# Altium PCB FOC Drive.PcbDoc
Units mil, origin at the board's own origin, x right, y up, seen from the top; angles counter-clockwise.
Board outline 2700 x 1600 mil, 2 copper layers (Top Layer, Bottom Layer); 48 components, 44 nets, 259 pads, 33 vias.
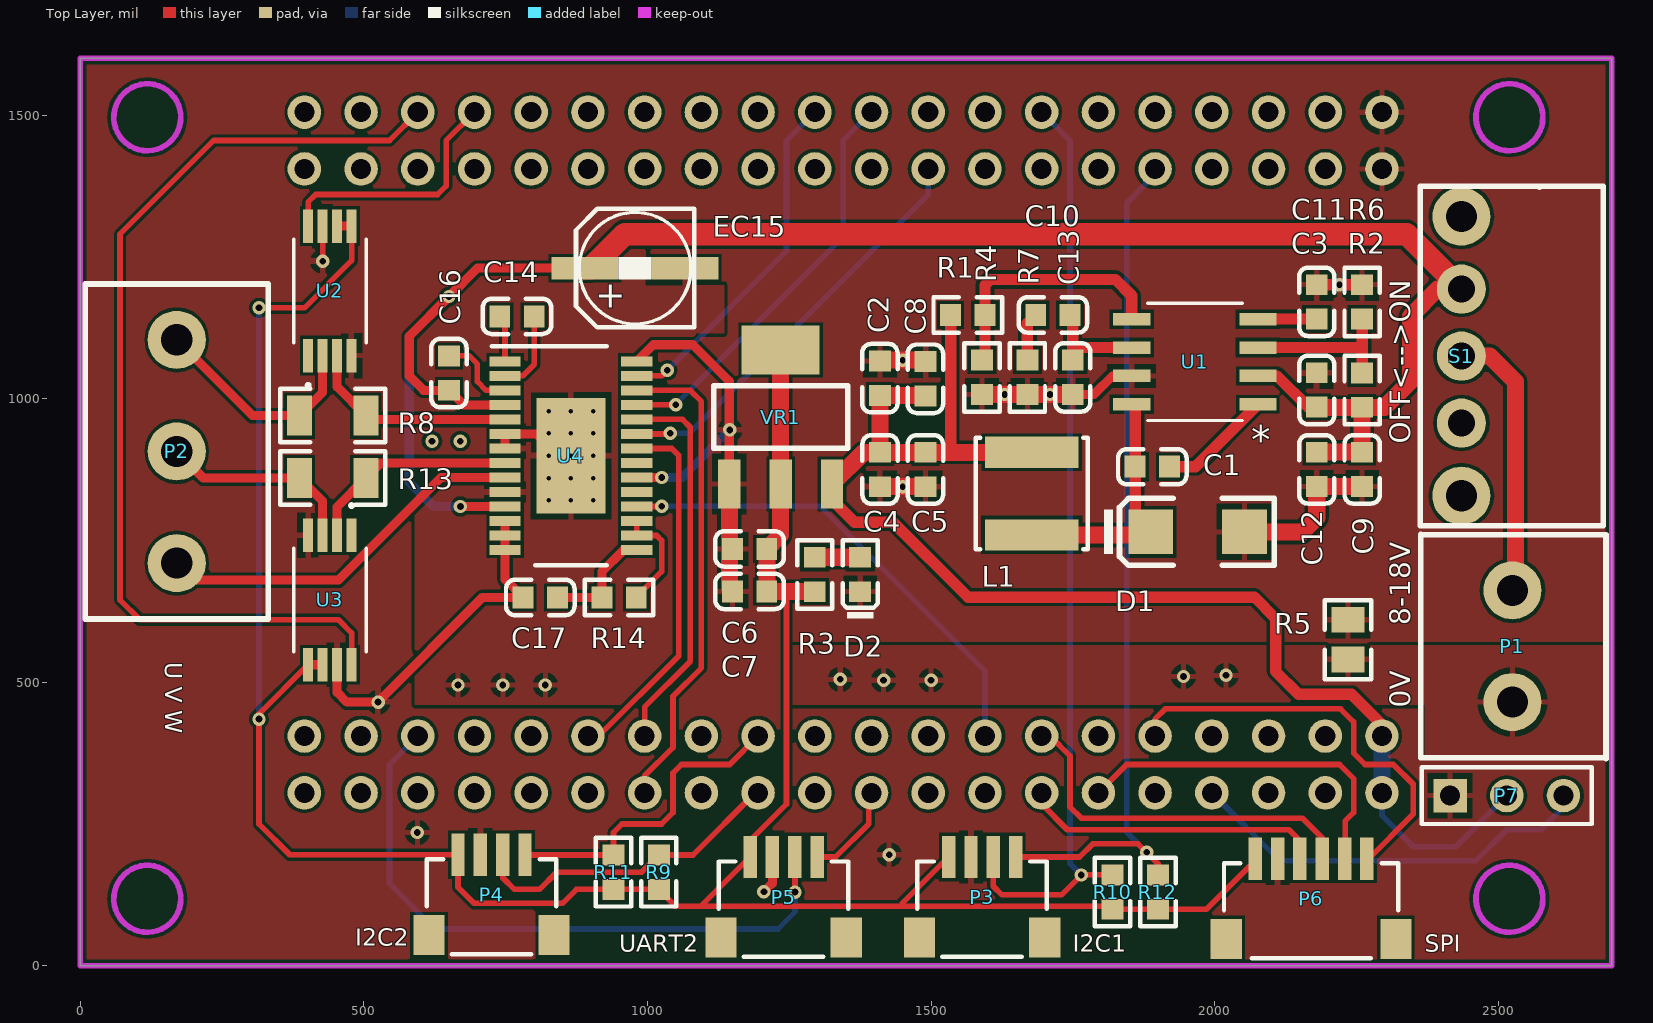
[diagram p0: Top Layer view]
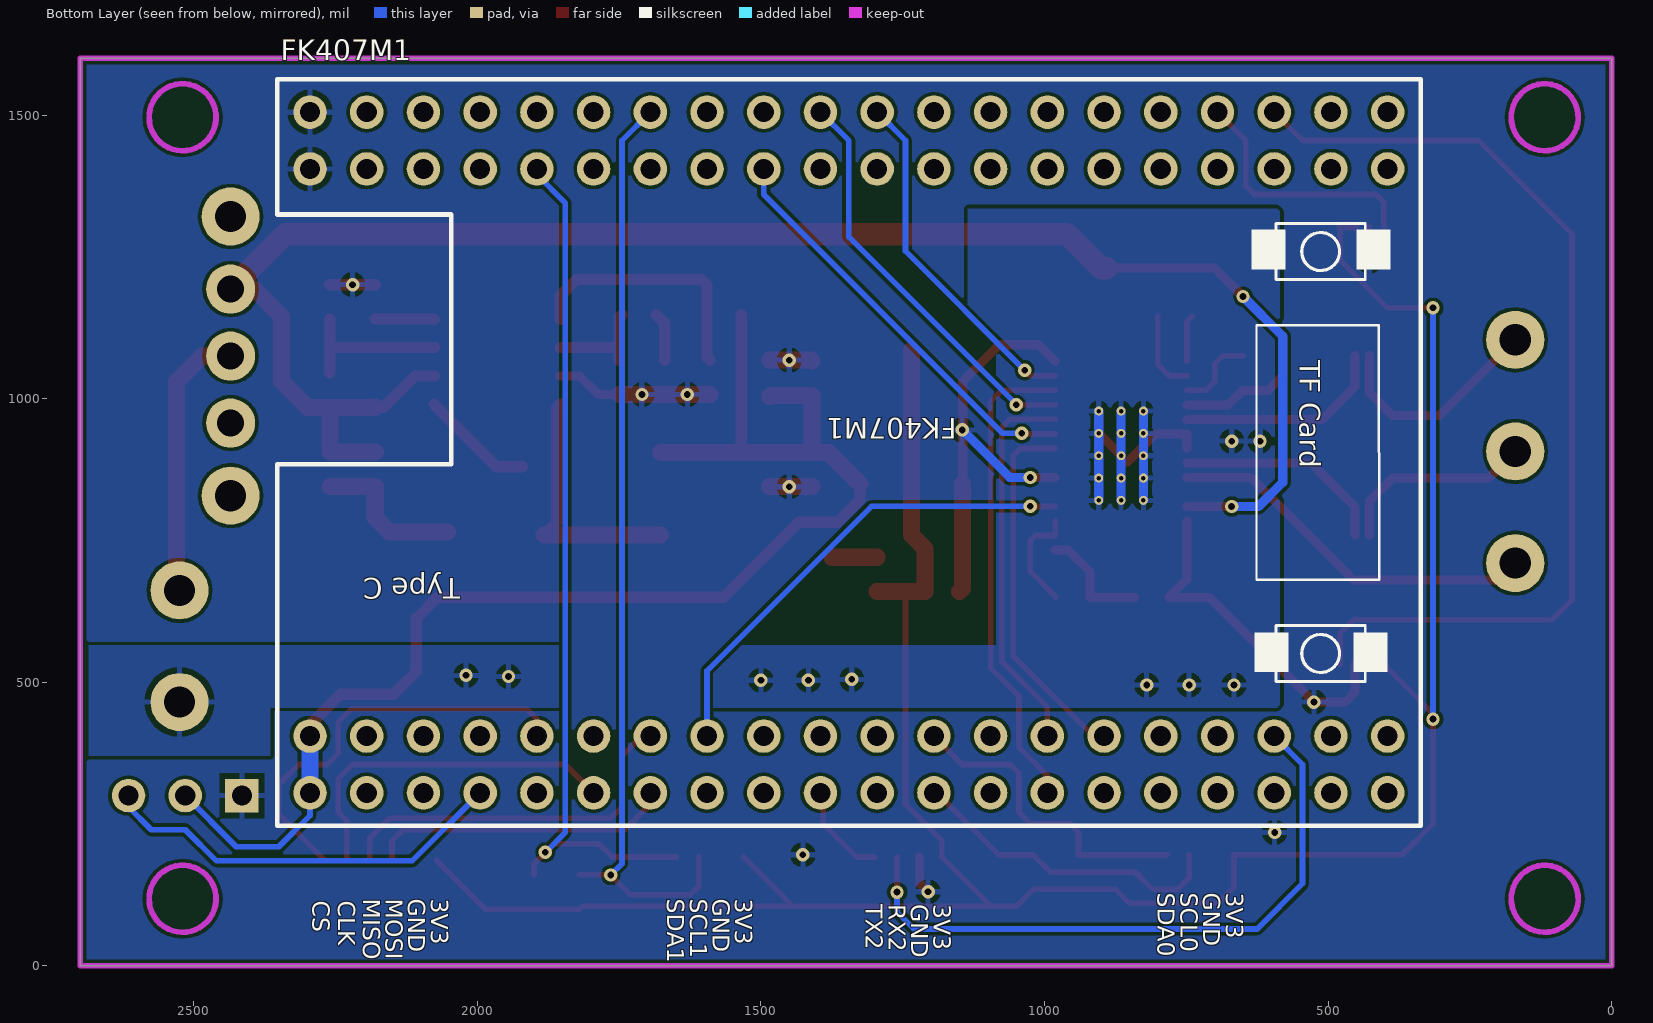
[diagram p1: Bottom Layer view, seen from below]
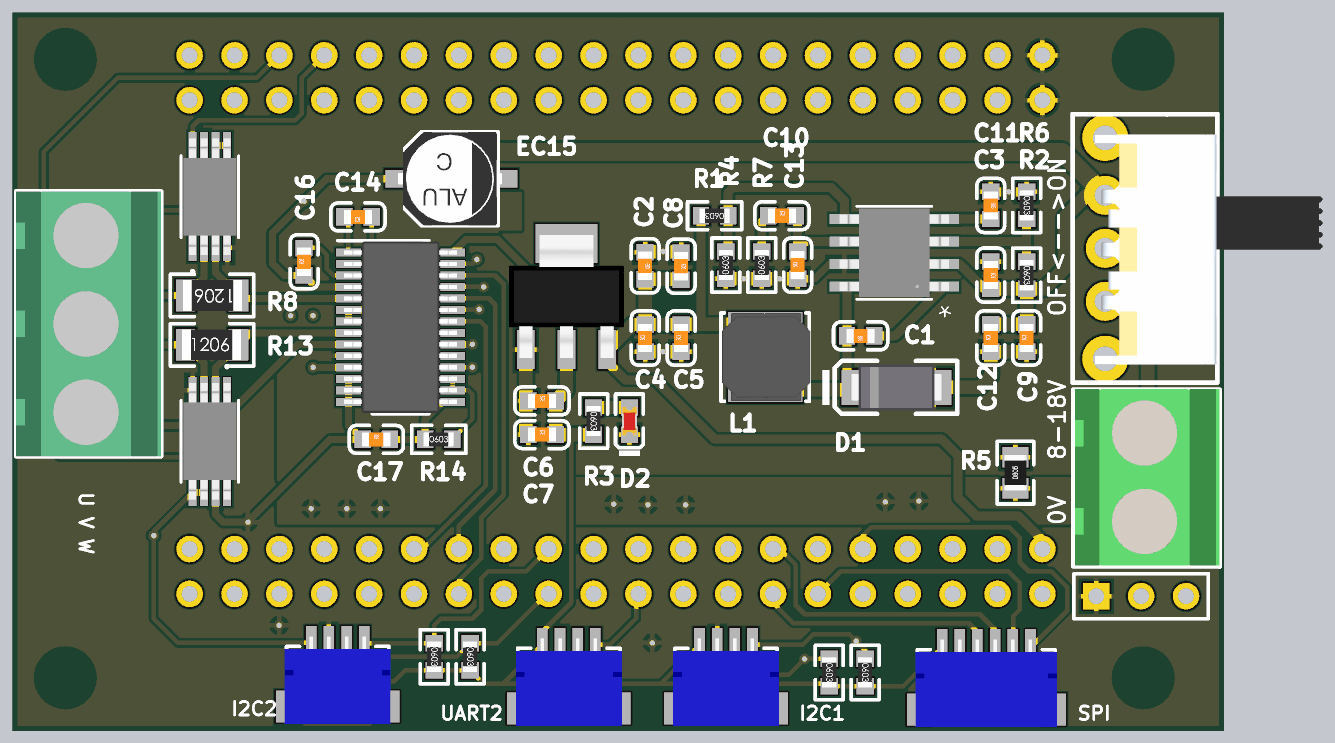
[diagram p2: 3D render of the assembled board from above, using the file's embedded part models]

## Layer stack, top to bottom
Top Solder: solder mask 0.4, Solder Resist, Dk 3.5
Top Layer: signal copper 1.4
Dielectric 1: dielectric 12.6, FR-4, Dk 4.8
Bottom Layer: signal copper 1.4
Bottom Solder: solder mask 0.4, Solder Resist, Dk 3.5

## Board outline
0,0 0,1600 2700,1600 2700,0

## Design rules (kind name [scope] priority, off if disabled: settings)
Clearance [All] p1: gap=6 ignorepadtopadclearanceinfootprint=TRUE
PolygonConnect [All] p1: connectstyle=Relief reliefconductorwidth=10 reliefentries=4 polygonreliefangle="90 Angle" airgapwidth=10
RoutingVias [All] p1: holewidth=28 width=50 viastyle="Through Hole" minholewidth=28 minwidth=50 maxholewidth=28 maxwidth=50
SolderMaskExpansion [All] p1: expansion=4
Width [All] p1: maxlimit=80 minlimit=6 preferedwidth=10
30 further rules are at their usual default settings.

## Components (designator, comment, footprint, x,y, rotation, side; value= is the part's Value field where it differs from the comment)
C1 "100nF (104) 10% 50V" 0603_C 1890,880 r180 top
C2 "47uF (476) 10% 50V" 0603_C 1409.77,1036.03 r270 top
C3 "100nF (104) 10% 50V" 0603_C 2180,1015.32 r270 top
C4 "22uF (226) 20% 6.3V" 0603_C 1410,875 r90 top
C5 "100nF (104) 10% 50V" 0603_C 1490,875 r90 top
C6 "22uF (226) 20% 6.3V" 0603_C 1180,735 r0 top
C7 "100nF (104) 10% 50V" 0603_C 1180,660 r0 top
C8 "47uF (476) 10% 50V" 0603_C 1490,1035 r270 top
C9 "4.7uF (475) 10% 16V" 0603_C 2260,875.32 r90 top
C10 "1.2nF (122) 10% 50V" 0603_C 1714.73,1147.57 r0 top
C11 "8.2nF (822) 10% 50V" 0603_C 2180,1170.63 r270 top
C12 "4.7uF (475) 10% 16V" 0603_C 2180,875.32 r90 top
C13 "10pF (100) 5% 50V" 0603_C 1749.73,1037.57 r90 top
C14 "10nF (103) 10% 50V" 0603_C 770,1145 r180 top
C16 "100nF (104) 10% 50V" 0603_C 650,1045 r90 top
C17 "100nF (104) 10% 50V" 0603_C 810.94,649.37 r0 top
D1 "SS36" SMA(DO-214AC)_S5 1970,765 r0 top
D2 "红灯 0603" 0603_LED_S1 1375,690 r90 top
EC15 "10uF" SMD-EC5.0X5.3X5.4 890,1230 r0 top
FK407M1 "M1" FK407M1 2295,405 r0 bottom
L1 "6.8uH" IND-SMD_L5.0-W5.0_SWPA5040S 1685,835 r270 top
P1 "Header 2" KF127-2P-5mm 2525,465 r90 top
P2 "Header 3" KF127-3P-5mm 170,710 r90 top
P3 "MOLEX" SH1.0-4P-L 1590,120.91 r0 top
P4 "MOLEX" SH1.0-4P-L 725,125 r0 top
P5 "MOLEX" SH1.0-4P-L 1240,120.91 r0 top
P6 "SH_6P" SH1.0-6P-L 2170,118.11 r0 top
P7 "Header 3" HDR1X3 2415,300 r0 top
R1 "10KΩ (1002) ±1%" 0603_R 1564.73,1147.57 r180 top
R2 "330KΩ (3303) ±1%" 0603_R 2260,1015 r270 top
R3 "1KΩ (1001) ±1%" 0603_R 1295,690 r270 top
R4 "1.8KΩ (1801) ±1%" 0603_R 1589.73,1037.57 r90 top
R5 "0Ω (0R0) ±1%" 0805_R 2235,575 r90 top
R6 "68KΩ (6802) ±1%" 0603_R 2260,1170.63 r270 top
R7 "30KΩ (3002) ±1%" 0603_R 1669.73,1037.57 r90 top
R8 "0.01Ω" 1206_R 445,970 r180 top
R9 "4.7KΩ (4701) ±1%" 0603_R 1020,165 r270 top
R10 "4.7KΩ (4701) ±1%" 0603_R 1820,130 r270 top
R11 "4.7KΩ (4701) ±1%" 0603_R 940,165 r270 top
R12 "4.7KΩ (4701) ±1%" 0603_R 1900,130 r270 top
R13 "0.01Ω" 1206_R 445,860 r0 top
R14 "4.7KΩ (4701) ±1%" 0603_R 950,649.37 r0 top
S1 "弯角开关" SS-12F23 2435,1075 r90 top
U1 "TPS54331D" D8-M 1965,1065 r180 top
U2 "INA240A1PW" PW0008A_N_TEX 440,1190 r90 top
U3 "INA240A1PW" PW0008A_N_TEX 440,645 r270 top
U4 "DRV8313PWP" PWP0028F_N 865,899.37 r0 top
VR1 "AMS1117-3.3" SOT-223 1234.73,967.57 r270 top

## Footprints (in the part's own frame and the unit in brackets; to place one, negate y for a bottom-side part, rotate by r counter-clockwise, add the part's x,y. Pads: shape width x height; smd on the part's side, far side on the other; paste and mask are expansions set on the pad)
0603_C [mm]
  rect 0.93x0.98 smd: 1(-0.77,0) 2(0.77,0)
  silkscreen extent -1.53,-0.79 1.54,0.79, body extent -0.8,-0.4 0.8,0.4, height 0.3
0603_LED_S1 [mm]
  rect 0.93x0.98 smd: A(0.77,0) K(-0.77,0)
  silkscreen extent -1.98,-0.79 1.54,0.79, body extent -0.8,-0.4 0.8,0.4, height 0.6
0603_R [mm]
  rect 0.93x0.98 smd: 1(-0.77,0) 2(0.77,0)
  silkscreen extent -1.53,-0.79 1.54,0.79, body extent -0.85,-0.4 0.85,0.4, height 0.56
0805_R [mm]
  rect 1.16x1.47 smd: 1(-0.89,0) 2(0.89,0)
  silkscreen extent -1.77,-1.04 1.77,1.03, body extent -1,-0.62 1,0.63, height 0.49
1206_R [mm]
  rect 1.13x1.8 smd: 1(-1.49,0) 2(1.49,0)
  silkscreen extent -2.36,-1.2 2.35,1.2, body extent -1.7,-0.86 1.65,0.87, height 0.85
D8-M [mil]
  rect 65.5x22 smd paste+0 mask+0: 1(-111.25,75) 2(-111.25,25) 3(-111.25,-25) 4(-111.25,-75) 5(111.25,-75) 6(111.25,-25) 7(111.25,25) 8(111.25,75)
  silkscreen extent -84,-104 84,104, body extent -122,-99 122,99, height 69
FK407M1 [mm]
  round 1.5 hole 0.9: 1(0,-25.4) 2(0,-27.94) 3(-2.54,-25.4) 4(-2.54,-27.94) 5(-5.08,-25.4) 6(-5.08,-27.94) 7(-7.62,-25.4) 8(-7.62,-27.94) 9(-10.16,-25.4) 10(-10.16,-27.94) 11(-12.7,-25.4) 12(-12.7,-27.94) 13(-15.24,-25.4) 14(-15.24,-27.94) 15(-17.78,-25.4) 16(-17.78,-27.94) 17(-20.32,-25.4) 18(-20.32,-27.94) 19(-22.86,-25.4) 20(-22.86,-27.94) 21(-25.4,-25.4) 22(-25.4,-27.94) 23(-27.94,-25.4) 24(-27.94,-27.94) 25(-30.48,-25.4) 26(-30.48,-27.94) 27(-33.02,-25.4) 28(-33.02,-27.94) 29(-35.56,-25.4) 30(-35.56,-27.94) 31(-38.1,-25.4) 32(-38.1,-27.94) 33(-40.64,-25.4) 34(-40.64,-27.94) 35(-43.18,-25.4) 36(-43.18,-27.94) 37(-45.72,-25.4) 38(-45.72,-27.94) 39(-48.26,-25.4) 40(-48.26,-27.94) 41(0,2.54) 42(0,0) 43(-2.54,2.54) 44(-2.54,0) 45(-5.08,2.54) 46(-5.08,0) 47(-7.62,2.54) 48(-7.62,0) 49(-10.16,2.54) 50(-10.16,0) 51(-12.7,2.54) 52(-12.7,0) 53(-15.24,2.54) 54(-15.24,0) 55(-17.78,2.54) 56(-17.78,0) 57(-20.32,2.54) 58(-20.32,0) 59(-22.86,2.54) 60(-22.86,0) 61(-25.4,2.54) 62(-25.4,0) 63(-27.94,2.54) 64(-27.94,0) 65(-30.48,2.54) 66(-30.48,0) 67(-33.02,2.54) 68(-33.02,0) 69(-35.56,2.54) 70(-35.56,0) 71(-38.1,2.54) 72(-38.1,0) 73(-40.64,2.54) 74(-40.64,0) 75(-43.18,2.54) 76(-43.18,0) 77(-45.72,2.54) 78(-45.72,0) 79(-48.26,2.54) 80(-48.26,0)
  silkscreen extent -49.73,-29.41 1.47,4.01
HDR1X3 [mm] "Connector; Header; 3 Position"
  rect 1.5x1.5 hole 0.9: 1(0,0)
  round 1.5 hole 0.9: 2(2.54,0) 3(5.08,0)
  silkscreen extent -1.27,-1.27 6.35,1.27
IND-SMD_L5.0-W5.0_SWPA5040S [mm]
  rect 1.4x4.2 smd: 1(-1.788,-0.192) 2(1.912,-0.192)
  silkscreen extent -2.44,-2.69 2.56,2.31, body extent -2.45,-2.63 2.55,2.37, height 4
KF127-2P-5mm [mm]
  round 2.6 hole 1.4: 1(0,0) 2(5,0)
  silkscreen extent -2.54,-4.19 7.5,4.1, body extent -2.46,-4.19 7.54,4.01, height 10
KF127-3P-5mm [mm]
  round 2.6 hole 1.4: 1(0,0) 2(5,0) 3(10,0)
  silkscreen extent -2.5,-4.1 12.5,4.1, body extent -2.51,-4.1 12.49,4.1, height 10
PW0008A_N_TEX [mil]
  rect 59x18 smd paste+0 mask+2: 1(-114.17,38.39) 2(-114.17,12.8) 3(-114.17,-12.8) 4(-114.17,-38.39) 5(114.17,-38.39) 6(114.17,-12.8) 7(114.17,12.8) 8(114.17,38.39)
  silkscreen extent -169,-64 92,64, body extent -130,-59 130,59, height 47
PWP0028F_N [mm]
  rect 1.4x0.45 smd paste+0 mask+0.051: 1(-2.95,4.225) 2(-2.95,3.575) 3(-2.95,2.925) 4(-2.95,2.275) 5(-2.95,1.625) 6(-2.95,0.975) 7(-2.95,0.325) 8(-2.95,-0.325) 9(-2.95,-0.975) 10(-2.95,-1.625) 11(-2.95,-2.275) 12(-2.95,-2.925) 13(-2.95,-3.575) 14(-2.95,-4.225) 15(2.95,-4.225) 16(2.95,-3.575) 17(2.95,-2.925) 18(2.95,-2.275) 19(2.95,-1.625) 20(2.95,-0.975) 21(2.95,-0.325) 22(2.95,0.325) 23(2.95,0.975) 24(2.95,1.625) 25(2.95,2.275) 26(2.95,2.925) 27(2.95,3.575) 28(2.95,4.225)
  rect 3.1x5.18 smd paste+0 mask+0.051: 29(0,0)
  round 0.4 hole 0.203 mask+0.051: V(-1,-2) V(-1,-1) V(-1,0) V(-1,1) V(-1,2) V(0,-2) V(0,-1) V(0,0) V(0,1) V(0,2) V(1,-2) V(1,-1) V(1,0) V(1,1) V(1,2)
  silkscreen extent -3.55,-4.9 1.6,4.9, body extent -3.2,-4.85 3.2,4.85, height 1.13
SH1.0-4P-L [mm]
  rect 1.4x1.8 smd: 0(-2.8,-1.8) 0(2.8,-1.8)
  rect 0.6x1.9 smd: 1(-1.5,1.8) 2(-0.5,1.8) 3(0.5,1.8) 4(1.5,1.8)
  silkscreen extent -2.9,-2.67 2.9,1.6, body extent -3,-2.79 3,2.16, height 2.96
SH1.0-6P-L [mm]
  rect 1.4x1.8 smd: 0(-3.8,-1.8) 0(3.8,-1.8)
  rect 0.6x1.9 smd: 1(-2.5,1.8) 2(-1.5,1.8) 3(-0.5,1.8) 4(0.5,1.8) 5(1.5,1.8) 6(2.5,1.8)
  silkscreen extent -3.9,-2.67 3.9,1.6, body extent -4,-2.79 4,2.16, height 2.96
SMA(DO-214AC)_S5 [mm]
  rect 2x2 smd: 1(2.1,0) 2(-2.1,0)
  silkscreen extent -4.2,-1.5 3.43,1.5, body extent -2.6,-1.3 2.6,1.3, height 2.5
SMD-EC5.0X5.3X5.4 [mm]
  rect 3x1 smd: 1(0,0) 2(4.477,0)
  silkscreen extent -0.41,-2.65 4.89,2.66, body extent -0.79,-2.65 5.11,2.65, height 5.41
SOT-223 [mm]
  rect 2.2x1 smd: 1(3,-2.3) 2(3,0) 3(3,2.3)
  rect 2.2x3.5 smd: 2(-3,0)
  silkscreen extent -1.4,-3 1.4,3, body extent -3.49,-3.24 3.49,3.24, height 1.64
SS-12F23 [mm] "弯角开关"
  round 2.2 hole 1.2: 1(-3,0) 2(0,0) 3(3,0)
  round 2.6 hole 1.4: 4(6.25,0) 5(-6.25,0)
  silkscreen extent -7.6,-6.35 7.6,1.85, body extent -6.57,-12.3 6.43,0.6, height 5.85

## Part data
C1 C3 C5 C7 C16 C17: library part "0603 100nF (104) 10% 50V", "贴片电容", Package=0603, SuppliersPartNumber=C14663, ComponentLink1Description=供应商链接, ComponentLink1URL=http://www.szlcsc.com/product/details_15331.html, Supplier=LC
C2 C8: library part "0603 47nF (473) 10% 50V", "贴片电容", Package=0603, SuppliersPartNumber=C1622, ComponentLink1Description=供应商链接, ComponentLink1URL=http://www.szlcsc.com/product/details_1974.html, Supplier=LC
C4 C6: library part "0603 22uF (226) 20% 6.3V", "贴片电容", Package=0603, SuppliersPartNumber=C59461, ComponentLink1Description=供应商链接, ComponentLink1URL=http://www.szlcsc.com/product/details_60514.html, Supplier=LC
C9 C12: library part "0603 4.7uF (475) 10% 16V", "贴片电容", Package=0603, SuppliersPartNumber=C19666, ComponentLink1Description=供应商链接, ComponentLink1URL=http://www.szlcsc.com/product/details_20375.html, Supplier=LC
C10: library part "0603 1.2nF (122) 10% 50V", "贴片电容", Package=0603, SuppliersPartNumber=C30615, ComponentLink1Description=供应商链接, ComponentLink1URL=http://www.szlcsc.com/product/details_31372.html, Supplier=LC
C11: library part "0603 8.2nF (822) 10% 50V", "贴片电容", Package=0603, SuppliersPartNumber=C27920, ComponentLink1Description=供应商链接, ComponentLink1URL=http://www.szlcsc.com/product/details_28670.html, Supplier=LC
C13: library part "0603 10pF (100) 5% 50V", "贴片电容", Package=0603, SuppliersPartNumber=C1634, ComponentLink1Description=供应商链接, ComponentLink1URL=http://www.szlcsc.com/product/details_1986.html, Supplier=LC
C14: library part "0603 10nF (103) 10% 50V", "贴片电容", Package=0603, SuppliersPartNumber=C57112, ComponentLink1Description=供应商链接, ComponentLink1URL=http://www.szlcsc.com/product/details_58143.html, Supplier=LC
D1: library part "SMA(DO-214AC) US1M", "二极管", Package=SMA(DO-214AC), SuppliersPartNumber=C5441, ComponentLink1Description=供应商, ComponentLink1URL=http://www.szlcsc.com/product/details_5885.html, Supplier=LC
D2: library part "0603 红灯", "发光二极管", Package=0603, SuppliersPartNumber=C2286, ComponentLink1Description=供应商链接, ComponentLink1URL=http://www.szlcsc.com/product/details_2659.html, Supplier=LC
EC15: library part SMD_ECAP, "贴片电解电容"
FK407M1: library part FK407M1
L1: library part L, "5040"
P1: library part "Header 2 5mm", "Header, 2-Pin", LatestRevisionDate=17-Jul-2002, LatestRevisionNote="Re-released for DXP Platform.", Publisher="Altium Limited"
P2 P7: "Header, 3-Pin", LatestRevisionDate=17-Jul-2002, LatestRevisionNote="Re-released for DXP Platform.", Publisher="Altium Limited"
P3 P4 P5: library part SH_4P, LatestRevisionDate=17-Jul-2002, LatestRevisionNote="Re-released for DXP Platform.", Publisher="Altium Limited"
P6: "Header, 6-Pin", LatestRevisionDate=17-Jul-2002, LatestRevisionNote="Re-released for DXP Platform.", Publisher="Altium Limited"
R1: library part "0603 10KΩ (1002) 1%", "贴片电阻", Package=0603, SuppliersPartNumber=C25804, ComponentLink1Description=供应商链接, ComponentLink1URL=http://www.szlcsc.com/product/details_26547.html, Supplier=LC
R2: library part "0603 330KΩ (3303) 1%", "贴片电阻", Package=0603, SuppliersPartNumber=C23137, ComponentLink1Description=供应商链接, ComponentLink1URL=http://www.szlcsc.com/product/details_23864.html, Supplier=LC
R3: library part "0603 1KΩ (1001) 1%", "贴片电阻", Package=0603, SuppliersPartNumber=C21190, ComponentLink1Description=供应商链接, ComponentLink1URL=http://www.szlcsc.com/product/details_21904.html, Supplier=LC
R4: library part "0603 1.8KΩ (1801) 1%", "贴片电阻", Package=0603, SuppliersPartNumber=C4177, ComponentLink1Description=供应商链接, ComponentLink1URL=http://www.szlcsc.com/product/details_4584.html, Supplier=LC
R5: library part "0805 0Ω (0R0) 1%", "贴片电阻", Package=0805, SuppliersPartNumber=C17477, ComponentLink1Description=供应商链接, ComponentLink1URL=http://www.szlcsc.com/product/details_18165.html, Supplier=LC
R6: library part "0603 68KΩ (6802) 1%", "贴片电阻", Package=0603, SuppliersPartNumber=C23231, ComponentLink1Description=供应商链接, ComponentLink1URL=http://www.szlcsc.com/product/details_23958.html, Supplier=LC
R7: library part "0603 30KΩ (3002) 1%", "贴片电阻", Package=0603, SuppliersPartNumber=C22984, ComponentLink1Description=供应商链接, ComponentLink1URL=http://www.szlcsc.com/product/details_23711.html, Supplier=LC
R8 R13: library part "1206 0Ω (0R0) 1%", "贴片电阻", Package=1206, SuppliersPartNumber=C17888, ComponentLink1Description=供应商链接, ComponentLink1URL=http://www.szlcsc.com/product/details_18576.html, Supplier=LC
R9 R10 R11 R12 R14: library part "0603 4.7KΩ (4701) 1%", "贴片电阻", Package=0603, SuppliersPartNumber=C23162, ComponentLink1Description=供应商链接, ComponentLink1URL=http://www.szlcsc.com/product/details_23889.html, Supplier=LC
S1: library part SS-12F23
U1 U2 U3 U4: "No Description Available", Mfr_Name="Texas Instruments", Copyright="Copyright (C) 2022 Ultra Librarian. All rights reserved.", RefDes=RefDes, Type=DEV
  U1: Manufacturer_Part_Number=TPS54331D
  U2 U3: Manufacturer_Part_Number=INA240A1PW
  U4: Manufacturer_Part_Number=DRV8313PWP
VR1: library part "SOT-223 AMS1117-3.3", "低压差线性稳压(LDO)", Package=SOT-223, SuppliersPartNumber=C6186, ComponentLink1Description=供应商链接, ComponentLink1URL=http://www.szlcsc.com/product/details_6652.html, Supplier=LC

## Via types
v1: diameter 23.62, hole 11.81, Top Layer to Bottom Layer, tented both sides, 33 vias

## Nets (pads, with @x,y where several pads share a name; then routed paths per layer and width w, separated by ;. In a path a pad name is that pad's centre, name@x,y a point inside that pad or via, vN(x,y) a via of type N, cw(c..) or ccw(c..) an arc to the next point about the centre after c; other vN are vias at no path point)
FAULT: FK407M1.56 U4.18 | length 849.1
  Top Layer w10: U4.18 1024.8,809.8 v1(1025,810)
  Bottom Layer w10: v1(1025,810) 1305,810 1595,520 FK407M1.56
GND: C2.1 C3.1 C4.1 C5.1 C6.1 C7.1 C8.1 C9.1 C11.1 C12.1 C13.1 C17.1 D1.1 D2.K FK407M1.1 FK407M1.2 P3.2 P4.2 P5.2 P6.2 P7.1 R4.1 R5.2 R6.1 R7.1 U1.7 U2.4 U2.7 U3.4 U3.7 U4.12 U4.13 U4.14 U4.20 U4.28 VR1.1 | length 2291.6
  Top Layer w10: v1(427.2,1242.2) U2.7
  Top Layer w16: U3.7 452.8,482.2 470,465 524.28,465 708.65,649.37 C17.1 748.86,681.14 U4.14 U4.13 U4.12 ; U4.20 v1(1025.12,860.98) ; U4.28 1010.43,1095 1079.76,1095 1144.18,1030.58 VR1.1 ; v1(1205.33,130.57) 1220.31,145.55 P5.2 ; C13.1 1787.14,1007.26 1820,1040.12 1853.63,1040.12 U1.7
  Top Layer w20: C11.1 R6.1
  Top Layer w30: VR1.1 1144.18,665.5 C7.1 ; C2.1 1411.31,1067.89 C8.1@1484.73,1067.89 ; C4.1 C5.1@1485,844.69 ; R4.1 R7.1 C13.1 ; D1.1 2154.68,765 2180,790.32 C12.1 C9.1
  Bottom Layer w16: v1(1025.12,860.98) 1061.43,860.98 v1(1145.23,944.77)
  other v1: 1426.03,195.87 594.27,235 525,465 1450,844.69 1629.73,1007.26 1709.73,1007.26 1450,1067.89 2220,1200.95
M0_EN1: FK407M1.67 U4.26 | length 853.4
  Top Layer w10: U4.26 1075.47,1014.53 1095,995 1095,525.24 1045,475.24 1045,385 995,335 FK407M1.67
M0_EN2: FK407M1.68 U4.24 | length 677.9
  Top Layer w10: U4.24 1061.65,963.35 1075.47,949.53 1075.47,536.69 995,456.22 FK407M1.68
M0_EN3: FK407M1.70 U4.22 | length 651.1
  Top Layer w10: FK407M1.70 913.65,405 1055,546.35 1055,900 1042.83,912.17 U4.22
M0_IN1: FK407M1.22 U4.27 | length 620.6
  Top Layer w10: U4.27 1025.12,1040.12 v1(1035,1050)
  Bottom Layer w10: v1(1035,1050) 1245,1260 1245,1455 FK407M1.22
M0_IN2: FK407M1.20 U4.25 | length 727.5
  Top Layer w10: U4.25 v1(1050,988.94)
  Bottom Layer w10: v1@1049.47,989.47 1345,1285 1345,1455 FK407M1.20
M0_IN3: FK407M1.17 U4.23 | length 733.8
  Top Layer w10: U4.23 1039.02,937.76 v1(1040,938.74)
  Bottom Layer w10: v1(1040,938.74) 1073.74,938.74 1495,1360 FK407M1.17
M0_OUT1_CS: FK407M1.34 U2.8 | length 448.3
  Top Layer w10: U2.8 401.61,1346.61 415,1360 630,1360 645,1375 645,1455 FK407M1.34
M0_OUT1_N: P2.3 R8.2 U2.2 | length 394.5
  Top Layer w16: P2.3 303.7,970 R8.2 427.2,1010.87 U2.2
M0_OUT1_P: R8.1 U2.3 U4.5 | length 374.8
  Top Layer w16: U2.3 452.8,1020.87 R8.1 510.31,963.35 U4.5
M0_OUT2_CS: FK407M1.36 U3.8 | length 1747.4
  Top Layer w10: U3.8 478.39,586.61 455,610 105,610 70,645 70,1290 235,1455 545,1455 FK407M1.36
M0_OUT2_N: P2.2 R13.1 U3.3 | length 353.5
  Top Layer w16: P2.2 216.85,860 R13.1 427.2,819.13 U3.3
M0_OUT2_P: R13.2 U3.2 U4.8 | length 378.1
  Top Layer w16: U3.2 452.8,809.13 R13.2 530.24,886.57 U4.8
M0_OUT3: P2.1 U4.9 | length 666.3
  Top Layer w16: P2.1 200,680 455.05,680 636.04,860.98 U4.9
NetC1_1: C1.1 U1.1 | length 201.5
  Top Layer w20: C1.1 1966.25,880 U1.1
NetC1_2: C1.2 D1.2 L1.2 U1.8 | length 446.6
  Top Layer w20: U1.8 1859.68,984.07 C1.2 1859.68,782.11 D1.2@1882.06,759.74
  Top Layer w30: L1.2 D1.2@1882.06,759.74
NetC10_1: C10.1 R7.2 | length 85.8
  Top Layer w20: R7.2 1669.73,1132.88 C10.1
NetC10_2: C10.2 C13.2 U1.6 | length 187.7
  Top Layer w20: C10.2 1749.73,1142.89 1749.73,1095 ; C13.2 1749.73,1095 ; U1.6 1754.73,1090 1749.73,1095
NetC11_2: C11.2 U1.4 | length 103.9
  Top Layer w20: U1.4 2076.57,1140.32 C11.2
NetC14_1: C14.1 U4.2 | length 144.5
  Top Layer w10: U4.2 780.12,1040.12 800.31,1060.31 C14.1
NetC14_2: C14.2 U4.1 | length 83.1
  Top Layer w10: C14.2 748.86,1135.83 U4.1
NetC16_2: C16.2 U4.3 | length 142.5
  Top Layer w10: C16.2 650.51,1075.83 685,1075.83 700,1060.83 700,1030 715.47,1014.53 U4.3
NetD2_A: D2.A R3.1 | length 80
  Top Layer w30: R3.1 D2.A
NetP1_2: P1.2 S1.2 | length 493.9
  Top Layer w30: S1.2 2485,1075 2530,1030 2530,666.85 P1.2
  Top Layer w50: S1.2 S1.2@2442.11,1067.89
NetR1_1: R1.1 R4.2 U1.5 | length 450.3
  Top Layer w20: R4.2 1595.05,1073.2 R1.1 1595.05,1200.05 1605,1210 1825,1210 1853.75,1181.25 U1.5
NetR2_1: R2.1 R6.2 U1.3 | length 279.9
  Top Layer w20: U1.3 2257.18,1090 2260,1092.82 ; R2.1 2260,1092.82 ; R6.2 2260,1092.82
NetR14_2: R14.2 U4.16 U4.17 | length 192.2
  Top Layer w10: R14.2 980.31,650.32 1025,695 1025,750 1016.38,758.62 U4.16 U4.17
PGND: EC15.2 P1.1 R5.1 U4.6 U4.7 U4.10 U4.29 U4.V | length 718.5
  Top Layer w16: U4.7 U4.6 804.17,937.76 U4.29@853.78,888.15 ; U4.29 904.37,938.74 U4.29@904.37,978.11
  Bottom Layer w16: U4.V@825.63,820.63 825.63,860 825.63,899.37 825.63,938.74 U4.V@825.63,978.11 ; U4.V@865,820.63 865,860 865,899.37 865,938.74 U4.V@865,978.11 ; U4.V@904.37,820.63 904.37,860 904.37,899.37 904.37,938.74 U4.V@904.37,978.11
  other v1: 665.94,495 745,495 820,495 1416.24,503.51 1500,503.51 1340,505 1945,510 2020,512.02 620,925 670,925
PPM: FK407M1.47 P7.3 | length 729.1
  Bottom Layer w10: FK407M1.47 2115,185 2460,185 2515,240 2575,240 2615,280 P7.3
SCL0: FK407M1.63 P4.3 R9.1 | length 570
  Top Layer w10: P4.3 744.68,155.32 765.32,134.68 809.68,134.68 840,165 989.69,165 R9.1 1080.31,195.31 1190,305 FK407M1.63
SCL1: FK407M1.14 P3.3 R10.1 | length 1656.7
  Top Layer w10: P3.3 1609.68,140.32 1625,125 1730,125 v1(1765,160) 1765.31,160.31 R10.1
  Bottom Layer w10: FK407M1.14 1745,1455 1745,180 v1(1765,160)
SDA0: FK407M1.64 P4.4 R11.1 | length 562.3
  Top Layer w10: P4.4 784.61,195.31 R11.1 940,235 955,250 1025,250 1045,270 1045,340 1060,355 1145,355 FK407M1.64
SDA1: FK407M1.9 P3.4 R12.1 | length 1535
  Top Layer w10: P3.4 1761.77,191.77 1785,215 1865,215 v1(1880,200) 1900,180 R12.1
  Bottom Layer w10: v1(1880,200) 1845,235 1845,1345 1895,1395 FK407M1.9
SPI3_CLK: FK407M1.51 P6.5 | length 631.8
  Top Layer w10: FK407M1.51 1845,355 2220,355 2245,330 2245,270 2230,255 2230,186.81 P6.5@2229.05,185.86
SPI3_CS: FK407M1.50 P6.6 | length 747.7
  Top Layer w10: FK407M1.50 1895,435 1913.01,453.01 2221.99,453.01 2245,430 2245,375 2265,355 2315,355 2350,320 2350,267.44 P6.6@2268.42,185.86
SPI3_MISO: FK407M1.54 P6.4 | length 661.3
  Top Layer w10: FK407M1.54 1710,405 1745,370 1745,280 1765,260 2155,260 2189.68,225.32 P6.4@2189.68,185.87
SPI3_MOSI: FK407M1.53 P6.3 | length 536.7
  Top Layer w10: FK407M1.53 1695,285 1740,240 2130.94,240 2150.31,220.63 P6.3@2150.31,185.86
U2_RX: FK407M1.76 P5.3 | length 1138.2
  Top Layer w10: P5.3 1260,191.45 v1(1260,130)
  Bottom Layer w10: FK407M1.76 545,355 545,145 625,65 1230,65 1260,95 v1(1260,130)
U2_TX: FK407M1.59 P5.4 | length 172.1
  Top Layer w10: P5.4 1331.77,191.77 1390,250 1390,300 FK407M1.59
V3P3: C17.2 R14.1 U4.15 | length 201.3
  Top Layer w16: C17.2 R14.1 919.68,695 957.72,733.03 U4.15
VCC_3V3: C6.2 C7.2 P3.1 P4.1 P5.1 P6.1 R3.2 R9.2 R10.2 R11.2 R12.2 U2.5 U2.6 U3.5 U3.6 VR1.2 | length 4514.8
  Top Layer w10: v1(315,1160) 395,1160 478.39,1243.39 U2.5 ; U3.5 315,444.21 v1(315,435) 315,250 369.13,195.87 P4.1 665.94,138.5 694.44,110 850,110 874.68,134.68 R11.2 R9.2 1049.68,105 1814.68,105 R10.2 R12.2 1985.39,99.68 P6.1@2071.57,185.87 ; 1094.59,105.41 P5.1 1180.94,220.94 1245,285 1245,655 1250,660 ; 1449.59,110.41 P3.1
  Top Layer w16: U3.5 U3.6 ; U2.6 U2.5
  Top Layer w30: VR1.2@1234.73,1085.68 1234.73,849.46 1234.73,759.42 C6.2 C7.2 1250,660 1294.68,660 R3.2
  Bottom Layer w10: v1(315,435) v1(315,1160)
VCC_5V: C2.2 C4.2 C5.2 C8.2 FK407M1.41 FK407M1.42 L1.1 P7.2 R1.2 VR1.3 | length 2452.9
  Top Layer w20: VR1.3 1325.29,821.82 1365,782.11 1432.89,782.11 1565,650 2070,650 2107.5,612.5 2107.5,518.97 2147.79,478.69 2241.31,478.69 2295,425 FK407M1.42 ; R1.2 1534.42,910.99 1540,905.41
  Top Layer w30: VR1.3 1381.14,905.31 C4.2 ; C8.2@1485,1003.92 1483.2,1005.72 C2.2 1409.77,905.54 C4.2 ; L1.1 1540,905.41 1485,905.41 1485,905.31 C4.2
  Bottom Layer w10: FK407M1.41 2295,265 2350,210 2425,210 P7.2
  Bottom Layer w30: FK407M1.41 FK407M1.42
VM: C3.2 C9.2 C12.2 C16.1 EC15.1 R2.2 S1.3 U1.2 U4.4 U4.11 | length 3467.4
  Top Layer w16: v1@670,810 v1(670.2,809.8) U4.11 ; U4.4 675.75,988.94 C16.1 605.43,1014.69 580,1040.12 580,1110 v1(650,1180) 700,1230 EC15.1
  Top Layer w20: U1.2 2110,1040 2165,985 C3.2
  Top Layer w30: C12.2 C9.2 R2.2 ; C3.2 2180.31,984.69 R2.2 ; S1.3 2393.11,1193.11 2345,1145 2345,1030 2299.69,984.69 R2.2
  Top Layer w40: EC15.1 900,1230 960,1290 2338.11,1290 S1.3
  Bottom Layer w16: v1(650,1180) 580,1110 580,852.47 622.66,809.8 v1(670.2,809.8)
pads on no net: FK407M1.3 FK407M1.4 FK407M1.5 FK407M1.6 FK407M1.7 FK407M1.8 FK407M1.10 FK407M1.11 FK407M1.12 FK407M1.13 FK407M1.15 FK407M1.16 FK407M1.18 FK407M1.19 FK407M1.21 FK407M1.23 FK407M1.24 FK407M1.25 FK407M1.26 FK407M1.27 FK407M1.28 FK407M1.29 FK407M1.30 FK407M1.31 FK407M1.32 FK407M1.33 FK407M1.35 FK407M1.37 FK407M1.38 FK407M1.39 FK407M1.40 FK407M1.43 FK407M1.44 FK407M1.45 FK407M1.46 FK407M1.48 FK407M1.49 FK407M1.52 FK407M1.55 FK407M1.57 FK407M1.58 FK407M1.60 FK407M1.61 FK407M1.62 FK407M1.65 FK407M1.66 FK407M1.69 FK407M1.71 FK407M1.72 FK407M1.73 FK407M1.74 FK407M1.75 FK407M1.77 FK407M1.78 FK407M1.79 FK407M1.80 P3.0 P4.0 P5.0 P6.0 S1.1 S1.4 S1.5 U2.1 U3.1 U4.19 U4.21

## Polygon pours and split planes (outlines as drawn)
GND on Top Layer "Top Layer-No Net" (solid, remove dead copper, pour order 10): -45,1630 2700,1630 2700,-25 -30,-25
PGND on Top Layer "Top Layer-No Net" (solid, remove dead copper, pour order 6): 2370,370 2690,370 2690,540 2685,545 2690,550 2690,565 1086.25,565 1066.25,585 1085,603.75 1085,1115 1135,1115 1135,1360 590,1360 590,460 2370,460
no net on Top Layer "Top Layer-No Net" (solid, remove dead copper, pour order 4): 2690,370
GND on Bottom Layer "Top Layer-No Net" (solid, remove dead copper, pour order 12): -35,1635 2730,1635 2740,1625 2725,1610 2725,-15 -20,-15 -25,-20
PGND on Bottom Layer "Top Layer-No Net" (solid, remove dead copper, pour order 8): 2685,370 2685,565 1085,565 1085,1115 1090,1120 1095,1115 1135,1115 1135,1335 590,1335 585,1330 585,460 590,455 2365,455 2365,370

## Keep-outs
Keep-Out Layer:
  lines w10: 176.92,123.46 ccw(c118.11,118.11) 177.17,118.11 ; 176.92,1501.41 ccw(c118.11,1496.06) 177.17,1496.06 ; 2578.5,123.46 ccw(c2519.68,118.11) 2578.74,118.11 ; 2578.5,1501.41 ccw(c2519.68,1496.06) 2578.74,1496.06 ; 0,0 0,1600 2700,1600 2700,0 0,0

## Silkscreen, mask and mechanical layers (free items; w line width, h text height)
Top Overlay:
  text "OFF<-->ON" at 2345,920 h36 r90
  text "8-18V" at 2345,600 h36 r90
  text "U V W" at 150,535 h30 r270
  text "0V" at 2345,455 h36 r90
  text "I2C2" at 484.37,35 h30
  text "UART2" at 950,25 h30
  text "I2C1" at 1750,25 h30
  text "SPI" at 2370,25 h30
Bottom Overlay:
  text "3V3" at 680,128.46 h30 r90
  text "GND" at 720,128.46 h30 r90
  text "SCL0" at 760,128.46 h30 r90
  text "SDA0" at 800,128.46 h30 r90
  text "3V3" at 1545,118.14 h30 r90
  text "GND" at 1585,118.14 h30 r90
  text "SCL1" at 1625,118.14 h30 r90
  text "SDA1" at 1665,118.14 h30 r90
  text "3V3" at 2081.57,118.14 h30 r90
  text "GND" at 2121.57,118.14 h30 r90
  text "MOSI" at 2161.57,118.14 h30 r90
  text "MISO" at 2201.57,118.14 h30 r90
  text "CLK" at 2245,115 h30 r90
  text "CS" at 2290,115 h30 r90
  text "3V3" at 1195,108.14 h30 r90
  text "GND" at 1235,108.14 h30 r90
  text "RX2" at 1275,108.14 h30 r90
  text "TX2" at 1315,108.14 h30 r90

## Text inside footprints (layer, text, board x,y; h text height)
EC15: Top Overlay "+" at 907.51,1160.05 h47.24
FK407M1: Bottom Overlay "Type C" at 2030,683 h36 r180; Bottom Overlay "TF Card" at 550,1068 h36 r90
U1: Top Overlay "*" at 2098.75,973 h50 r180; Mechanical 13 "*" at 2041,1019.5 h50 r180